# Altium PCB PCB1.PcbDoc
Units mil, origin at the board's own origin, x right, y up, seen from the top; angles counter-clockwise.
Board outline 1555 x 1640 mil, 2 copper layers (Top Layer, Bottom Layer); 31 components, 30 nets, 126 pads, 75 vias.
Unrouted connection lines stored in the file: 1.
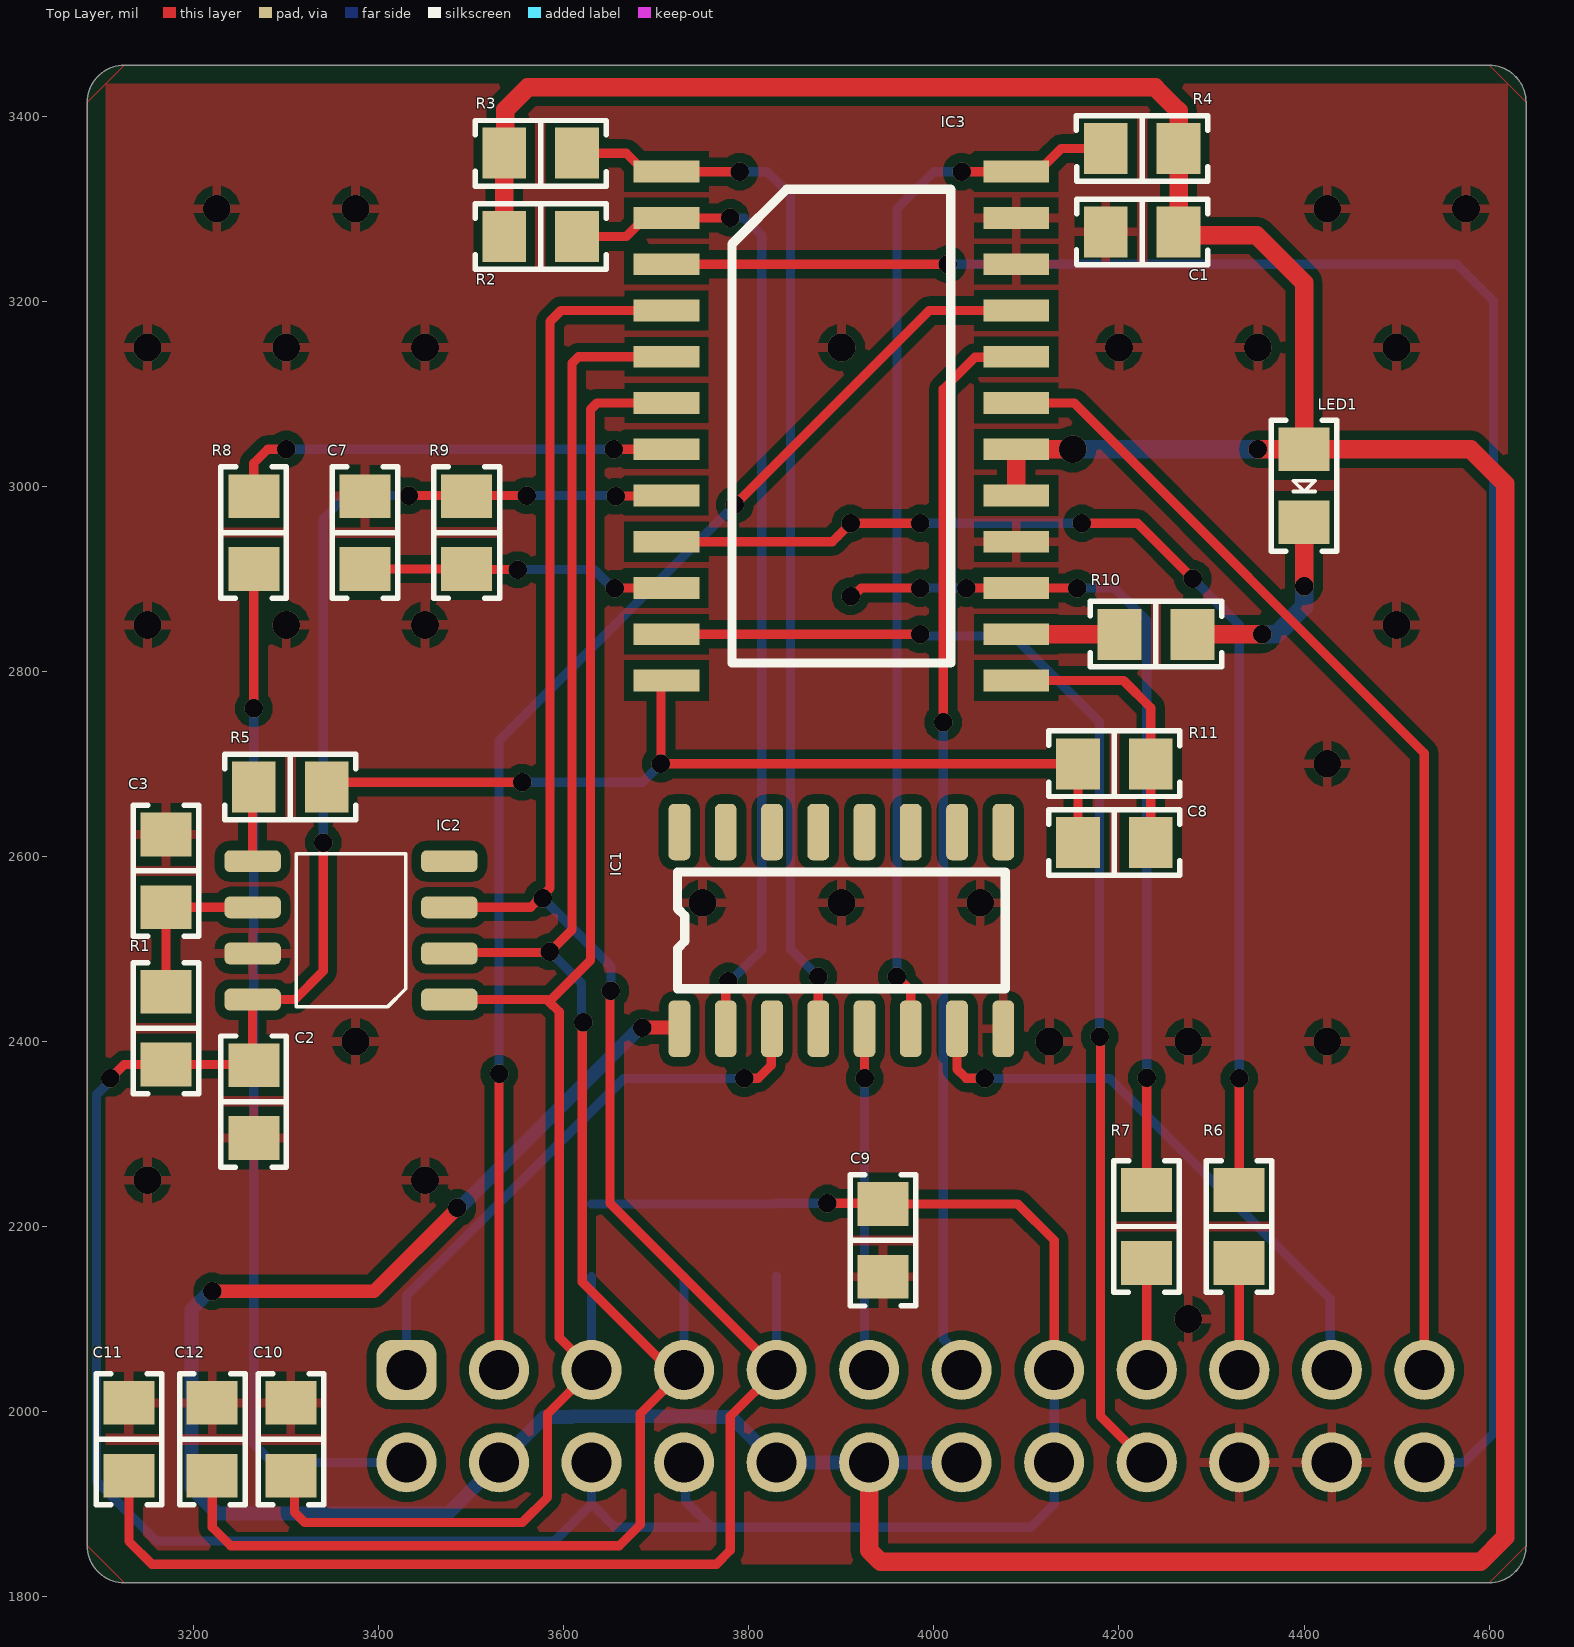
[diagram p0: Top Layer view]
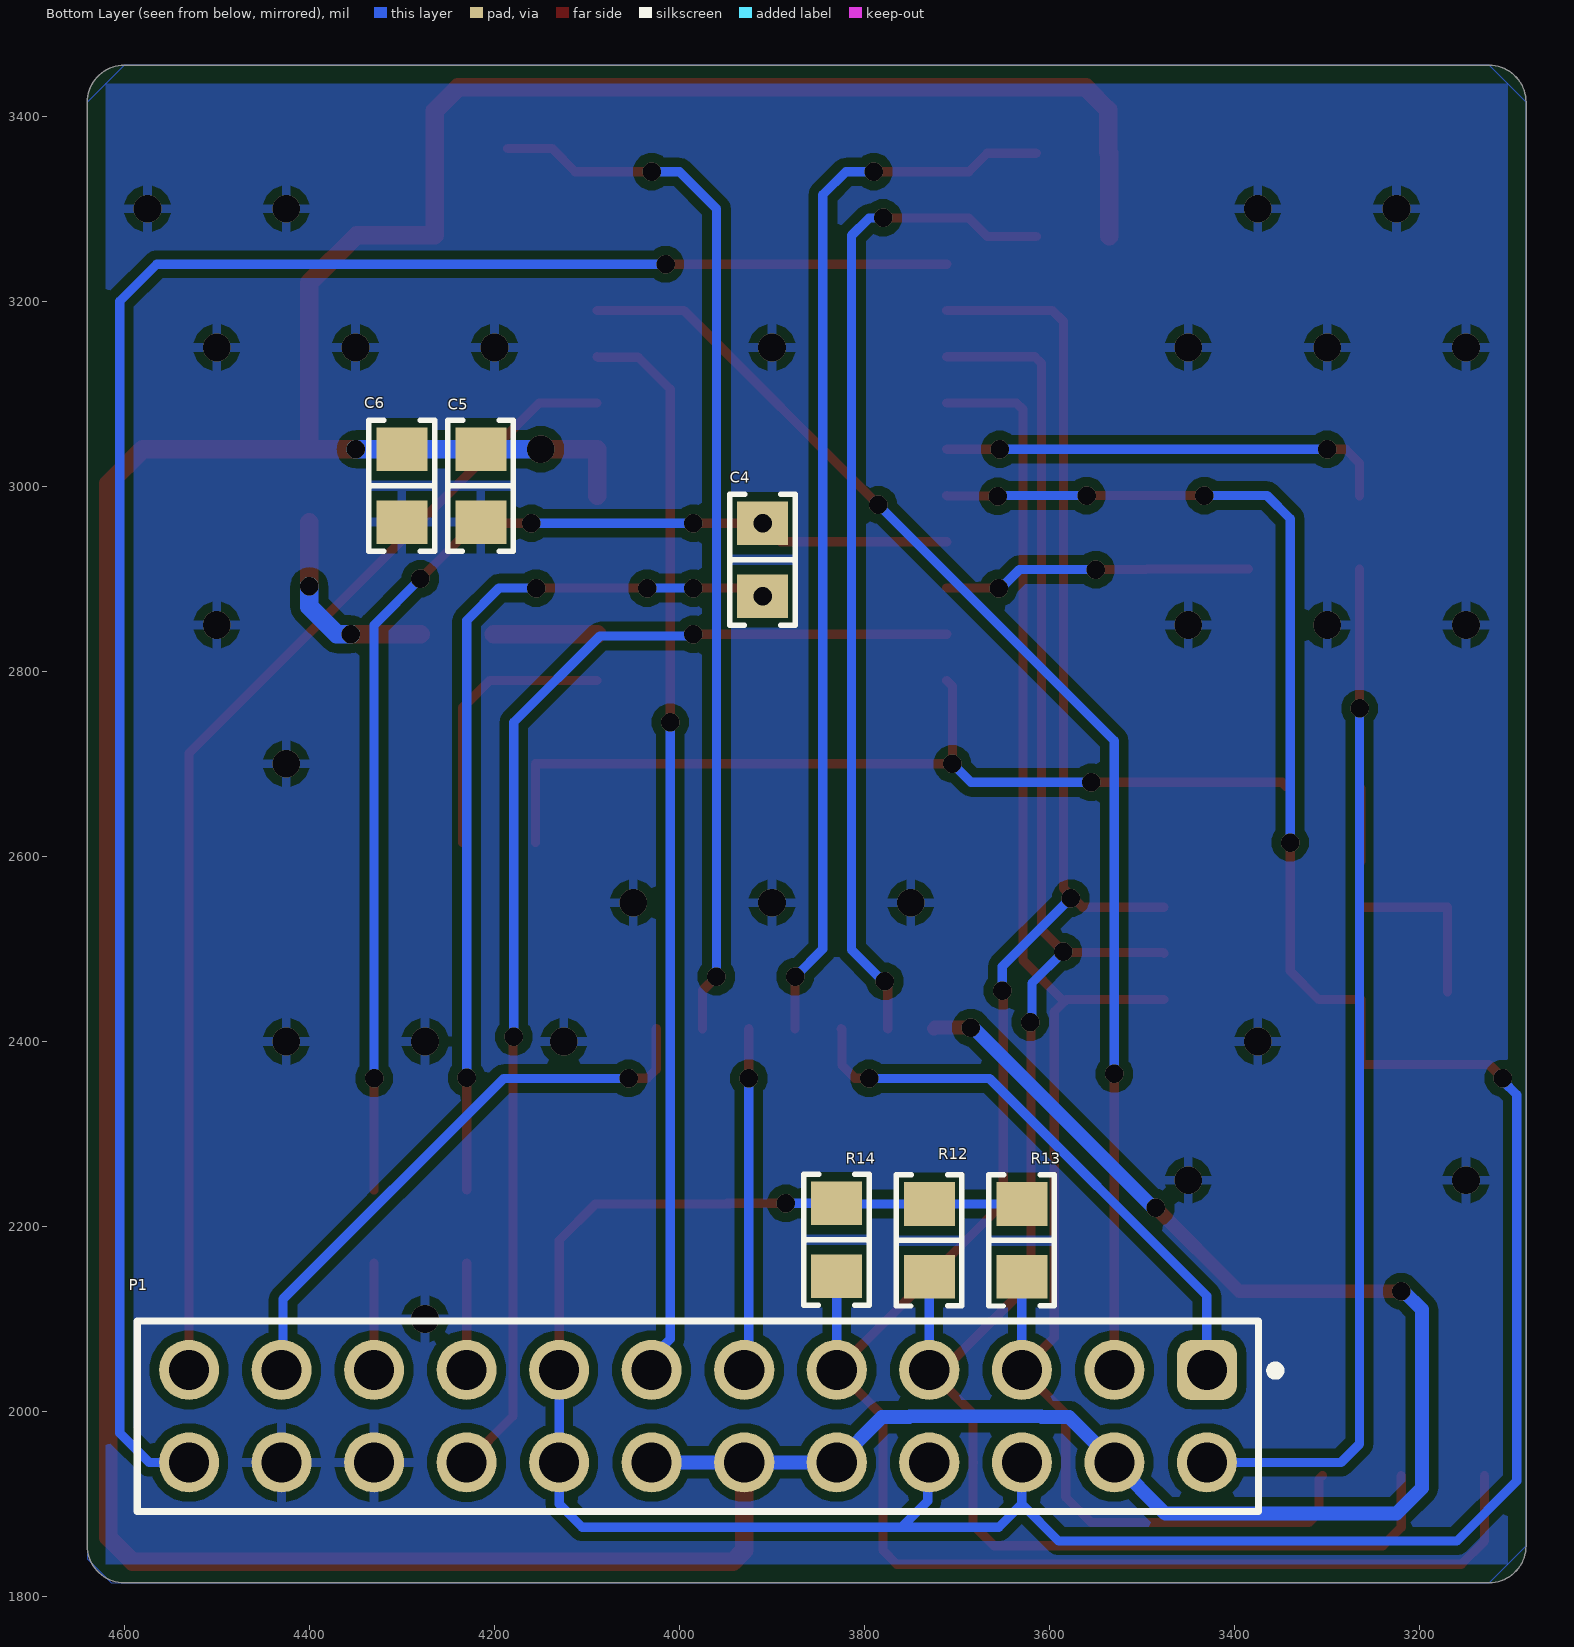
[diagram p1: Bottom Layer view, seen from below]
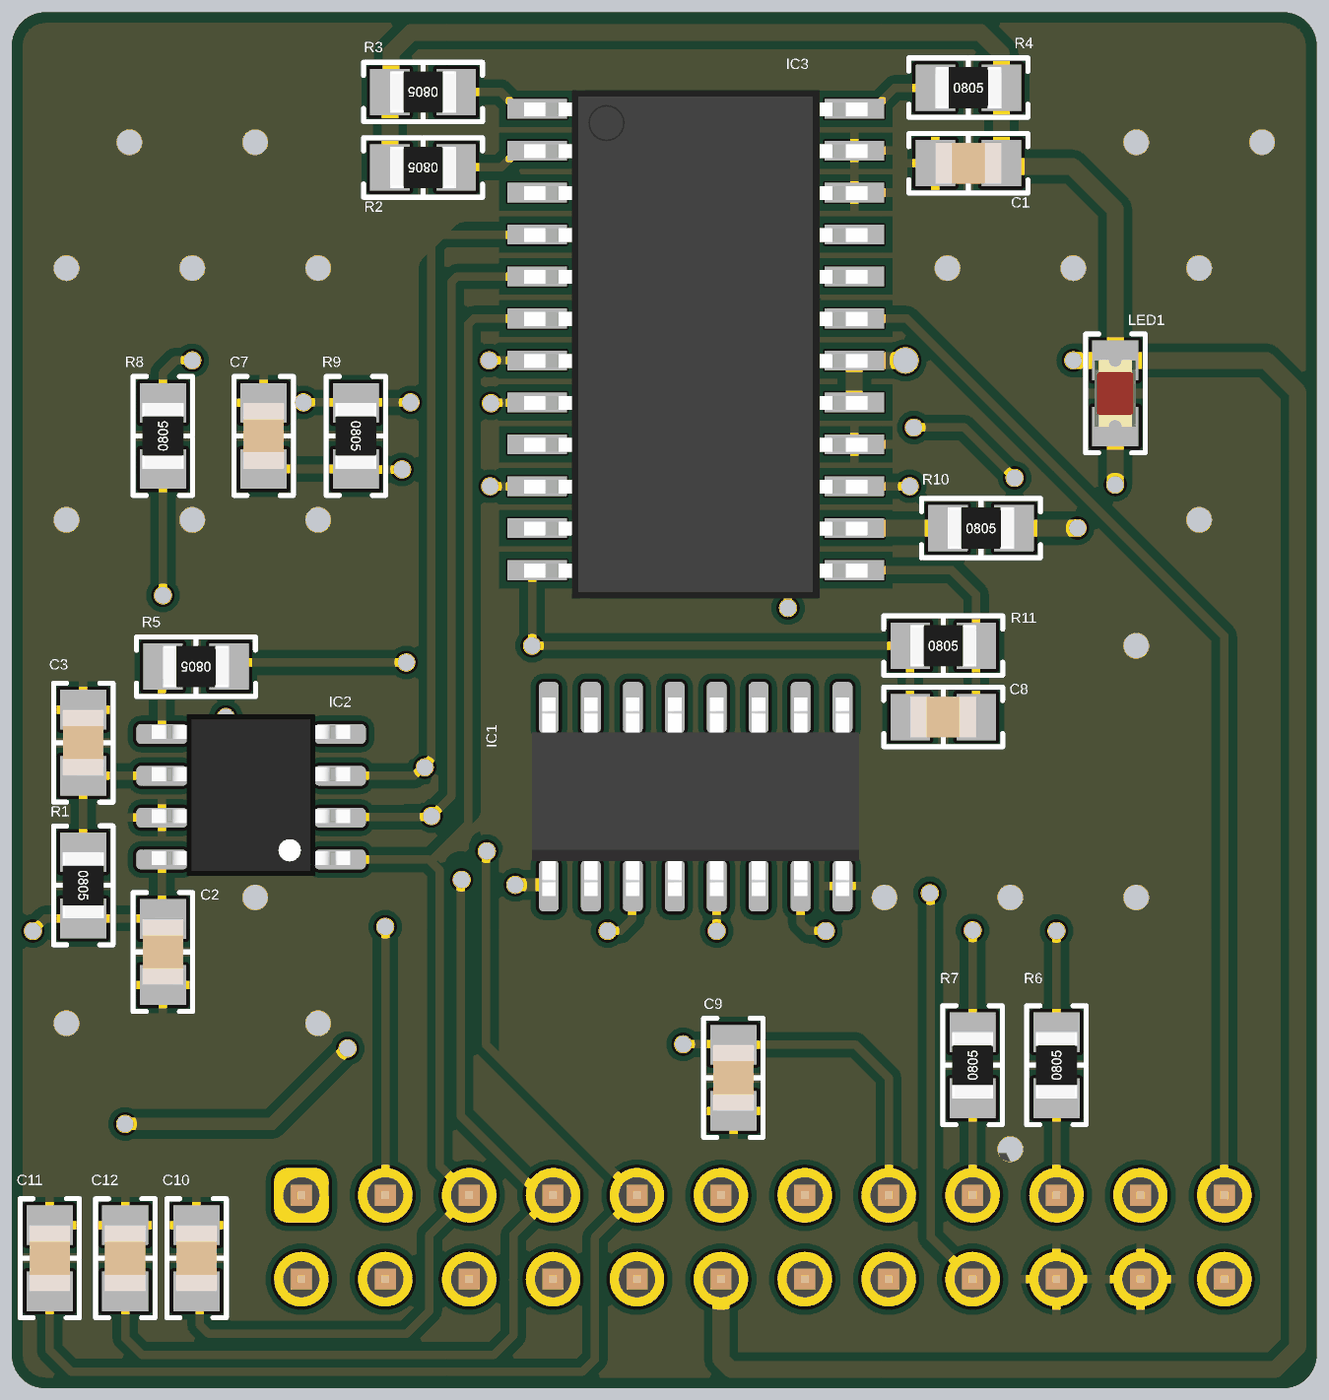
[diagram p2: 3D render of the assembled board from above, using the file's embedded part models]
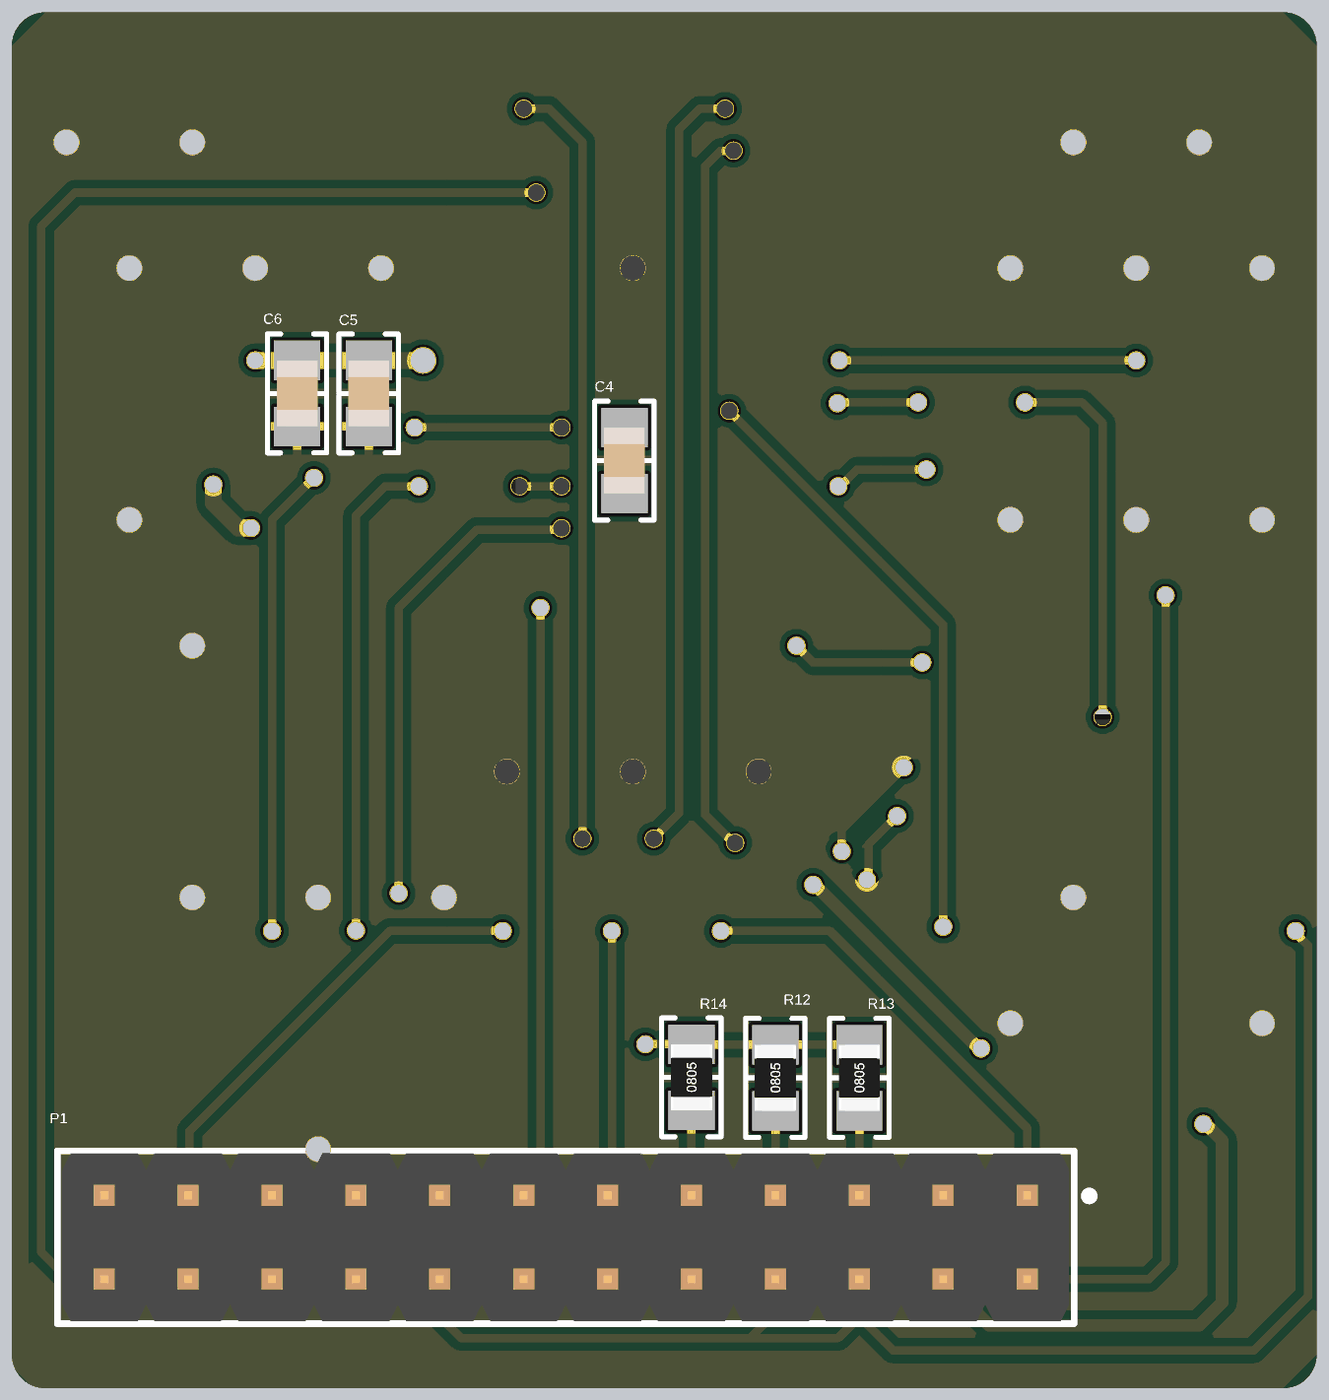
[diagram p3: 3D render of the assembled board from below, using the file's embedded part models]

## Layer stack, top to bottom
Top Solder: solder mask 0.4, Solder Resist, Dk 3.5
Top Layer: signal copper 1.4
Dielectric 1: dielectric 12.6, FR-4, Dk 4.8
Bottom Layer: signal copper 1.4
Bottom Solder: solder mask 0.4, Solder Resist, Dk 3.5

## Board outline
3085,1855 3085,3415 cw(c3125,3415) 3125,3455 4600,3455 cw(c4600,3415) 4640,3415 4640,1855 cw(c4600,1855) 4600,1815 3125,1815 cw(c3125,1855)

## Design rules (kind name [scope] priority, off if disabled: settings)
Clearance [All] p1: gap=10 ignorepadtopadclearanceinfootprint=FALSE except(0: Arc-Hole Track-Hole SMDPad-Hole THPad-Hole Via-Hole Fill-Hole Poly-Hole Region-Hole Text-Hole)
PolygonConnect [All] p1: connectstyle=Relief reliefconductorwidth=10 reliefentries=4 polygonreliefangle="90 Angle" airgapwidth=10
RoutingVias [All] p1: holewidth=20 width=20 viastyle="Through Hole" minholewidth=20 minwidth=20 maxholewidth=20 maxwidth=20
SolderMaskExpansion [All] p1: expansion=4 istentingtop=FALSE
Width [All] p1: maxlimit=40 minlimit=10 preferedwidth=10 minimp=50.000000 maximp=50.000000 favimp=50.000000
30 further rules are at their usual default settings.

## Components (designator, comment, footprint, x,y, rotation, side; value= is the part's Value field where it differs from the comment)
C1 "100nF 50V" 0805_CAP 4225,3275 r180 top
C2 "100nF 50V" 0805_CAP 3265,2335 r90 top
C3 "22nF 25V" 0805_CAP 3170,2584.37 r270 top
C4 "750pF 25V" 0805_CAP 3910,2920.63 r90 bottom
C5 "100nF 50V" 0805_CAP 4214.72,3000.63 r90 bottom
C6 "22uF 25V" 0805_CAP 4300,3000.63 r90 bottom
C7 "10nF 50V" 0805_CAP 3385,2950 r270 top
C8 "100nF 50V" 0805_CAP 4195,2615 r0 top
C9 "100nF 100V" 0805_CAP 3945,2185 r90 top
C10 "100nF 50V" 0805_CAP 3305,1970 r270 top
C11 "100nF 50V" 0805_CAP 3130,1970 r270 top
C12 "100nF 50V" 0805_CAP 3220,1970 r270 top
IC1 "CD4049UB" SOIC16 3900,2520 r90 top
IC2 "MC33039" SOIC8 3370,2520 r180 top
IC3 "MC33035" "SOIC-24 WB" 3900,3065 r270 top
LED1 "Green" 0805LED 4400,3000.63 r270 top
P1 "61302421121" 61302421121 3980,1995 r0 bottom
R1 "10k Ohms" 0805_RES 3170,2414.37 r270 top
R2 "10k Ohms" 0805_RES 3575,3270 r180 top
R3 "10k Ohms" 0805_RES 3575,3360 r180 top
R4 "10k Ohms" 0805_RES 4225,3365 r0 top
R5 "68k Ohms" 0805_RES 3304.37,2675 r180 top
R6 "10k Ohms" 0805_RES 4330,2200 r90 top
R7 "10k Ohms" 0805_RES 4230,2200 r90 top
R8 "4.7K Ohms" 0805_RES 3265,2950 r90 top
R9 "10k Ohms" 0805_RES 3495,2950 r270 top
R10 "4.99K Ohms" 0805_RES 4240,2840 r0 top
R11 "10k Ohms" 0805_RES 4195,2700 r0 top
R12 "20k Ohms" 0805_RES 3730,2185 r90 bottom
R13 "20k Ohms" 0805_RES 3630,2185 r90 bottom
R14 "20k Ohms" 0805_RES 3830,2185.63 r90 bottom

## Footprints (in the part's own frame and the unit in brackets; to place one, negate y for a bottom-side part, rotate by r counter-clockwise, add the part's x,y. Pads: shape width x height; smd on the part's side, far side on the other; paste and mask are expansions set on the pad)
0805_CAP [mm]
  rect 1.2x1.4 smd: 1(-1,0) 2(1,0)
  silkscreen extent -1.8,-0.9 1.8,0.9, body extent -1,-0.62 1,0.63, height 0.6
0805_RES [mm]
  rect 1.2x1.4 smd: 1(-1,0) 2(1,0)
  silkscreen extent -1.8,-0.9 1.8,0.9, body extent -1,-0.62 1,0.63, height 0.6
0805LED [mm]
  rect 1.2x1.4 smd: 1(-1,0) 2(1,0)
  silkscreen extent -1.8,-0.9 1.8,0.9, body extent -1.01,-0.62 1.01,0.63, height 1.1
61302421121 [mm] "Pin Header, pitch 2.54 mm, THT, Vertical, dual row, 24p"
  rrect50% 1.65x1.65 hole 1.1: 1(-13.97,-1.27)
  round 1.65 hole 1.1: 2(-13.97,1.27) 3(-11.43,-1.27) 4(-11.43,1.27) 5(-8.89,-1.27) 6(-8.89,1.27) 7(-6.35,-1.27) 8(-6.35,1.27) 9(-3.81,-1.27) 10(-3.81,1.27) 11(-1.27,-1.27) 12(-1.27,1.27) 13(1.27,-1.27) 14(1.27,1.27) 15(3.81,-1.27) 16(3.81,1.27) 17(6.35,-1.27) 18(6.35,1.27) 19(8.89,-1.27) 20(8.89,1.27) 21(11.43,-1.27) 22(11.43,1.27) 23(13.97,-1.27) 24(13.97,1.27)
  silkscreen extent -15.97,-2.62 15.39,2.62, body extent -15.24,-2.54 15.24,2.54, height 8.59
SOIC8 [mm]
  rrect50% 1.55x0.6 smd mask+0.102: 1(-2.7,1.9) 2(-2.7,0.633) 3(-2.7,-0.633) 4(-2.7,-1.9) 5(2.7,-1.9) 6(2.7,-0.633) 7(2.7,0.633) 8(2.7,1.9)
  silkscreen extent -1.5,-2.1 1.5,2.1, body extent -3,-2.5 3,2.4, height 1.75
SOIC16 [mm] "R-PDSO-G16"
  rrect50% 1.55x0.6 smd mask+0.1: 1(-2.7,4.445) 2(-2.7,3.175) 3(-2.7,1.905) 4(-2.7,0.635) 5(-2.7,-0.635) 6(-2.7,-1.905) 7(-2.7,-3.175) 8(-2.7,-4.445) 9(2.7,-4.445) 10(2.7,-3.175) 11(2.7,-1.905) 12(2.7,-0.635) 13(2.7,0.635) 14(2.7,1.905) 15(2.7,3.175) 16(2.7,4.445)
  silkscreen extent -1.6,-4.5 1.6,4.5, body extent -3,-4.95 3,4.95, height 1.4
"SOIC-24 WB" [mm]
  rect 0.6x1.8 smd mask+0.05: 1(-6.985,-4.8) 2(-5.715,-4.8) 3(-4.445,-4.8) 4(-3.175,-4.8) 5(-1.905,-4.8) 6(-0.635,-4.8) 7(0.635,-4.8) 8(1.905,-4.8) 9(3.175,-4.8) 10(4.445,-4.8) 11(5.715,4.8) 11(5.715,-4.8) 12(6.985,-4.8) 13(6.985,4.8) 15(4.445,4.8) 16(3.175,4.8) 17(1.905,4.8) 18(0.635,4.8) 19(-0.635,4.8) 20(-1.905,4.8) 21(-3.175,4.8) 22(-4.445,4.8) 23(-5.715,4.8) 24(-6.985,4.8)
  silkscreen extent -6.5,-3 6.5,3, body extent -7.55,-5.2 7.85,5.2, height 2.6

## Part data
C1 C2 C3 C4 C5 C6 C7 C8 C9 C10 C11 C12: library part CAP_0805
IC1: "CMOS Hex Inverting Buffer and Converter", PartNumber=CD4049UB
IC2: "Closed Loop Brushless / Motor Adapter", componentlink1description=Datasheet, componentlink1url=https://www.onsemi.com/pdf/datasheet/mc33039-d.pdf, PartNumber=MC33039
IC3: "Brushless DC Motor Controller", componentlink1description="New link", componentlink1url=https://www.onsemi.com/pdf/datasheet/mc33035-d.pdf, PartNumber=MC33035
LED1: library part LED, "FAULT"
P1: "WR-PHD Pin Header, THT, Vertical, pitch 2.54mm, 2 Row, 24P", Contact Resistance=20mOhm, manufacturer="Wurth Elektronik", Operating Temperature Max=105°C, Operating Temperature Min=-40°C, Rated Current=3A, Withstanding Voltage=500V, Working Voltage=250V, Category="Board-to-Board Connectors", componentlink1description="Website Link", componentlink1url=https://www.we-online.com/redexpert/article/61302421121?ad, componentlink2description="Datasheet Link", componentlink2url=https://www.we-online.com/redexpert/spec/61302421121?ad, Gender="Pin Header", Manufacturer Part Number=61302421121, Match Code=WR-PHD, Mount="Through Hole", Number of Pins=24, Number of Rows=2, Orientation=Vertical, packaging=Bag, Pitch=2.54mm
R1 R2 R3 R4 R5 R6 R7 R8 R9 R10 R11 R12 R13 R14: library part RES_0805, "0805", Power="1/8 W"

## Via types
v1: diameter 20, hole 20, Top Layer to Bottom Layer, 48 vias
v2: diameter 30, hole 30, Top Layer to Bottom Layer, tented both sides, 26 vias
v3: diameter 30, hole 30, Top Layer to Bottom Layer, 1 vias

## Nets (pads, with @x,y where several pads share a name; then routed paths per layer and width w, separated by ;. In a path a pad name is that pad's centre, name@x,y a point inside that pad or via, vN(x,y) a via of type N, cw(c..) or ccw(c..) an arc to the next point about the centre after c; other vN are vias at no path point)
15V: C1.1 C5.2 C6.2 IC1.1 IC3.17 IC3.18 LED1.1 P1.4 P1.10 P1.12 P1.14 R2.2 R3.2 R4.2 | length 5643
  Top Layer w10: v3@4147.49,3040.14 4147.63,3040 v3(4150,3040)
  Top Layer w15: v1(3220,2130) 3395,2130 v1(3485,2220) ; v1(3685,2415) 3723.7,2415 IC1.1
  Top Layer w20: R2.2 R3.2 3536.7,3361.07 3536.7,3406.7 3561,3431 4239,3431 4264.37,3405.63 R4.2 C1.1 4264.37,3271.06 4348.94,3271.06 4400,3220 LED1.1 ; P1.12 3930,1850 3942.5,1837.5 4590.68,1837.5 4617.5,1864.32 4617.5,3002.5 4580,3040 LED1.1 ; IC3.17 IC3.18 v3@4147.63,3040 ; v1(4350,3040) LED1.1
  Bottom Layer w10: v1(3485,2220) v1@3487.5,2220 ; v1@3682.5,2415 v1(3685,2415)
  Bottom Layer w15: v1(3220,2130) 3217.39,2130 3197.48,2110.09 3197.48,1917.52 3225,1890 3475,1890 P1.4 3579,1994 3608.32,1994 3609.3,1994.98 3750.7,1994.98 3751.68,1994 3781,1994 P1.10 P1.12 P1.14 ; v1@3487.5,2220 v1@3682.5,2415
  Bottom Layer w20: v3(4150,3040) C5.2 C6.2 v1(4350,3040)
Close_Loop: C8.1 IC3.12 R5.1 R11.1 | length 999.7
  Top Layer w10: R5.1 3348.74,2680 v1(3555,2680) ; IC3.12 3705,2783.98 v1(3705,2700) R11.1 C8.1
  Bottom Layer w10: v1(3555,2680) 3685,2680 v1(3705,2700)
CS_IN: C4.2 IC3.9 R6.2 | length 1283.5
  Top Layer w10: IC3.9 3890.15,2940 3896,2945.86 3896,2946 v1(3910,2960) v1(3985,2960) ; v1(4160,2960) 4220,2960 v1(4280,2900) ; R6.2 v1(4330,2360)
  Bottom Layer w10: v1(3985,2960) v1(4160,2960) ; v1(4280,2900) 4330,2850 v1(4330,2360)
CS_IN!: C4.1 IC3.15 R7.2 | length 955.6
  Top Layer w10: v1(3910,2881.26) 3912.71,2881.26 3921.45,2890 v1(3985,2890) ; v1(4035,2890) IC3.15 v1(4155,2890) ; R7.2 v1(4230,2360.63)
  Bottom Layer w10: v1(3985,2890) v1(4035,2890) ; v1(4155,2890) 4195,2890 4230,2855 v1@4230,2358.78
Driver_AH: IC1.3 P1.1 | length 618.4
  Top Layer w10: v1@3795.89,2355.89 3795.89,2356.45 3799.62,2360.18 3810.18,2360.18 3824.31,2374.31 3824.31,2413.01 IC1.3
  Bottom Layer w10: P1.1 3430,2125 3665,2360 v1(3795,2360)
Driver_BH: IC1.5 P1.11 | length 370.8
  Top Layer w10: v1(3925,2360) IC1.5
  Bottom Layer w10: v1(3925,2360) 3925,2050 P1.11
Driver_CH: IC1.7 P1.21 | length 627.3
  Top Layer w10: IC1.7 4025,2370 4034.82,2360.18 4054.82,2360.18 v1(4055,2360)
  Bottom Layer w10: v1(4055,2360) 4190,2360 4428.38,2121.62 4428.38,2046.62 P1.21
ENABLE: P1.2 R8.1 | length 1118.9
  Top Layer w10: v1(3265,2760) R8.1
  Bottom Layer w10: v1(3265,2760) 3265,1965 3285,1945 P1.2
FOR/REV: IC3.3 P1.24 | length 2221.7
  Top Layer w10: IC3.3 v1(4015,3240)
  Bottom Layer w10: v1(4015,3240) 4565,3240 4604.9,3200.1 4604.9,1976.9 4573,1945 P1.24
GND: C1.2 C2.1 C3.1 C5.1 C6.1 C7.1 C9.1 C10.1 C11.1 C12.1 IC1.8 IC2.7 IC3.16 IC3.22 IC3.23 P1.20 P1.22
  other v2: 4275,2100 3150,2250 3450,2250 3375,2400 4125,2400 4275,2400 4425,2400 3750,2550 3900,2550 4050,2550 4425,2700 3150,2850 3300,2850 3450,2850 4500,2850 3150,3150 3300,3150 3450,3150 3900,3150 4200,3150 4350,3150 4500,3150 3225,3300 3375,3300 4425,3300 4575,3300
HALL_A: C11.2 IC2.3 IC3.4 P1.9 R14.1 | length 2532
  Top Layer w10: C11.2 3130,1860 3155,1835 3765,1835 3780,1850 3780,1995 P1.9 3650,2225 3650,2454 v1(3651,2455) ; IC2.3@3476.33,2544.97 3564.26,2544.97 3574.29,2555 v1(3577,2555) 3577,2557.71 3585,2565.71 3585,3178 3597,3190 IC3.4
  Bottom Layer w10: v1(3577,2555) 3651,2481 v1(3651,2455) ; P1.9 R14.1
HALL_B: C12.2 IC2.2 IC3.5 P1.7 R12.1 | length 2204.3
  Top Layer w10: C12.2 3220,1875 3240,1855 3660,1855 3682.7,1877.7 3682.7,1940.89 cw(c3730,1945) 3682.7,1949.11 3682.7,1997.7 P1.7 3715.13,2045 3699.05,2061.07 3698.93,2061.07 3620,2140 3620,2420 v1(3621,2421) ; IC2.2 3477.27,2496.03 v1@3584.03,2496.03 ; v1(3585,2497) 3608.78,2520.78 3608.78,3132.92 3615.86,3140 IC3.5
  Bottom Layer w10: v1(3585,2497) 3619.09,2462.91 3619.09,2422.91 v1(3621,2421) ; P1.7 R12.1
HALL_C: C10.2 IC2.1 IC3.6 P1.5 R13.1 | length 1857.8
  Top Layer w10: C10.2 3308.94,1926.69 3308.94,1891.06 3320,1880 3555,1880 3582.52,1907.52 3582.52,1997.52 P1.5 3595,2080 3595,2432 3584,2443 ; IC2.1 3581.8,2445.2 3584,2443 ; IC3.6 3635.86,3090 3628.78,3082.92 3628.78,2487.78 3584,2443
  Bottom Layer w10: P1.5 R13.1
NetC3_2: C3.2 IC2.6 R1.1 | length 185
  Top Layer w10: R1.1 C3.2 3170.07,2544.93 IC2.6
NetC7_2: C7.2 IC3.10 R9.2 | length 334.6
  Top Layer w10: C7.2 R9.2 3495.63,2910 v1(3550,2910) ; v1(3655,2890) IC3.10
  Bottom Layer w10: v1(3550,2910) 3632.57,2910 3652.57,2890 v1(3655,2890)
NetC8_2: C8.2 IC3.13 R11.2 | length 303.2
  Top Layer w10: IC3.13 4205,2790 4234.37,2760.63 R11.2 C8.2
NetIC2_5: IC2.5 R5.2 | length 80.7
  Top Layer w10: IC2.5 3263.7,2673.7 R5.2
NetIC3_7: IC3.7 R8.2 | length 487.9
  Top Layer w10: R8.2 3265,3025 3280,3040 v1(3300,3040) ; v1(3653.78,3040) IC3.7
  Bottom Layer w10: v1(3300,3040) v1(3653.78,3040)
NetIC3_14: 
NetLED1_2: LED1.2 R10.2 | length 224.3
  Top Layer w20: R10.2 4354.82,2840 v1(4355,2840.18) ; v1(4400,2892) LED1.2
  Bottom Layer w20: v1(4355,2840.18) 4370.18,2840.18 4400,2870 v1(4400,2892)
PWM_HA: IC1.2 IC3.2 R2.1 | length 1090.4
  Top Layer w10: R2.1 3667.4,3270 3687.4,3290 v1(3780,3290) ; IC1.2 3775,2459.29 3778,2462.29 v1(3778,2465)
  Bottom Layer w10: v1(3778,2465) 3780,2465 3814,2499 3814,3271 3795.18,3289.82 3780.18,3289.82 v1(3780,3290)
PWM_HB: IC1.4 IC3.1 R3.1 | length 1163
  Top Layer w10: R3.1 3667.4,3360 3687.4,3340 v1(3790,3340) ; IC1.4 v1(3875,2470)
  Bottom Layer w10: v1(3790,3340) 3820,3340 3845,3315 3845,2500 v1(3875,2470)
PWM_HC: IC1.6 IC3.24 R4.1 | length 1145.1
  Top Layer w10: v1(3960,2470) 3975,2455 IC1.6 ; v1(4030,3340) 4112.6,3340 4137.6,3365 R4.1
  Bottom Layer w10: v1(3960,2470) 3960,3300 4000,3340 v1(4030,3340)
PWM_LA: IC3.21 P1.3 | length 1431.6
  Top Layer w10: P1.3 v1(3530,2365) ; v1(3785,2980) 3995,3190 IC3.21
  Bottom Layer w10: v1(3530,2365) 3530,2725 v1(3785,2980)
PWM_LB: IC3.20 P1.13 | length 1161.8
  Top Layer w10: v1(4010,2745) 4010,3105 4044.4,3139.4 4088.38,3139.4 IC3.20
  Bottom Layer w10: v1(4010,2745) 4010,2078.34 4030,2058.34 P1.13
PWM_LC: IC3.19 P1.23 | length 1264.3
  Top Layer w10: IC3.19 4151.57,3090 4530,2711.57 P1.23
REF_OUT: C2.2 C9.2 IC2.8 IC3.8 P1.6 P1.8 P1.15 P1.16 R1.2 R9.1 R12.2 R13.2 R14.2 | length 3664.9
  Top Layer w10: v1(3110,2360) 3125,2375 C2.2@3264.37,2375 ; C2.2 C2.2@3264.37,2375 ; v1(3340,2615) 3340,2476.05 3309.14,2445.2 IC2.8 3263.7,2375.67 C2.2@3264.37,2375 ; v1(3432.56,2990) v1(3560,2990) ; v1(3656,2989) 3656.5,2989.5 3710.52,2989.5 IC3.8 ; v1(3885,2225) C9.2@3948.31,2225 ; C9.2 4090.63,2224.37 4130,2185 P1.15
  Bottom Layer w10: v1(3110,2360) 3110,2357.29 3095,2342.29 3095,1925 3160,1860 3590,1860 3630,1900 ; v1(3340,2615) 3340,2965 3365,2990 v1(3432.56,2990) ; v1(3560,2990) 3655,2990 v1(3656,2989) ; P1.6 3630,1900 ; R13.2 R12.2 3829.37,2224.37 R14.2 v1(3885,2225) ; P1.8 3731.62,1943.38 3731.62,1903.38 3760,1875 ; P1.15 P1.16 4130,1900 4105,1875 3760,1875 ; 3630,1900 3655,1875 3760,1875
SENSE_N: P1.17 R7.1 | length 115.6
  Top Layer w10: P1.17 R7.1
SENSE_P: P1.19 R6.1 | length 115.6
  Top Layer w10: P1.19 R6.1
SPEED_CMD: IC3.11 P1.18 R10.1 | length 1440.1
  Top Layer w10: IC3.11@3711.02,2840 v1(3985,2840) ; v1(4179,2405) 4180,2404 4180,1995 P1.18
  Top Layer w20: IC3.11@4088.98,2840 R10.1
  Bottom Layer w10: v1(3985,2840) 3986.91,2838.09 4085.91,2838.09 4179,2745 v1(4179,2405)
pads on no net: IC1.9 IC1.10 IC1.11 IC1.12 IC1.13 IC1.14 IC1.15 IC1.16 IC2.4

## Polygon pours and split planes (outlines as drawn)
GND on Top Layer "GND_L01_P015" (solid, pour order 15): 3105,3435 4620,3435 4620,1835 3105,1835
GND on Top Layer "NONET_L01_P000" (solid, shelved, pour order 0): 3125,3455 4600,3455 4640,3415 4640,1855 4600,1815 3125,1815 3085,1855 3085,3415
GND on Bottom Layer "GND_L02_P014" (solid, pour order 14): 3105,3435 4620,3435 4620,1835 3105,1835
GND on Bottom Layer "NONET_L02_P001" (solid, shelved, pour order 1): 3125,3455 4600,3455 4640,3415 4640,1841 4614,1815 3125,1815 3085,1855 3085,3415